# Altium PCB Z80.PcbDoc
Units mm, origin at the board's own origin, x right, y up, seen from the top; angles counter-clockwise.
Board outline 70 x 62.5 mm, 2 copper layers (Top Layer, Bottom Layer); 15 components, 45 nets, 178 pads, 8 vias.
Unrouted connection lines stored in the file: 95.
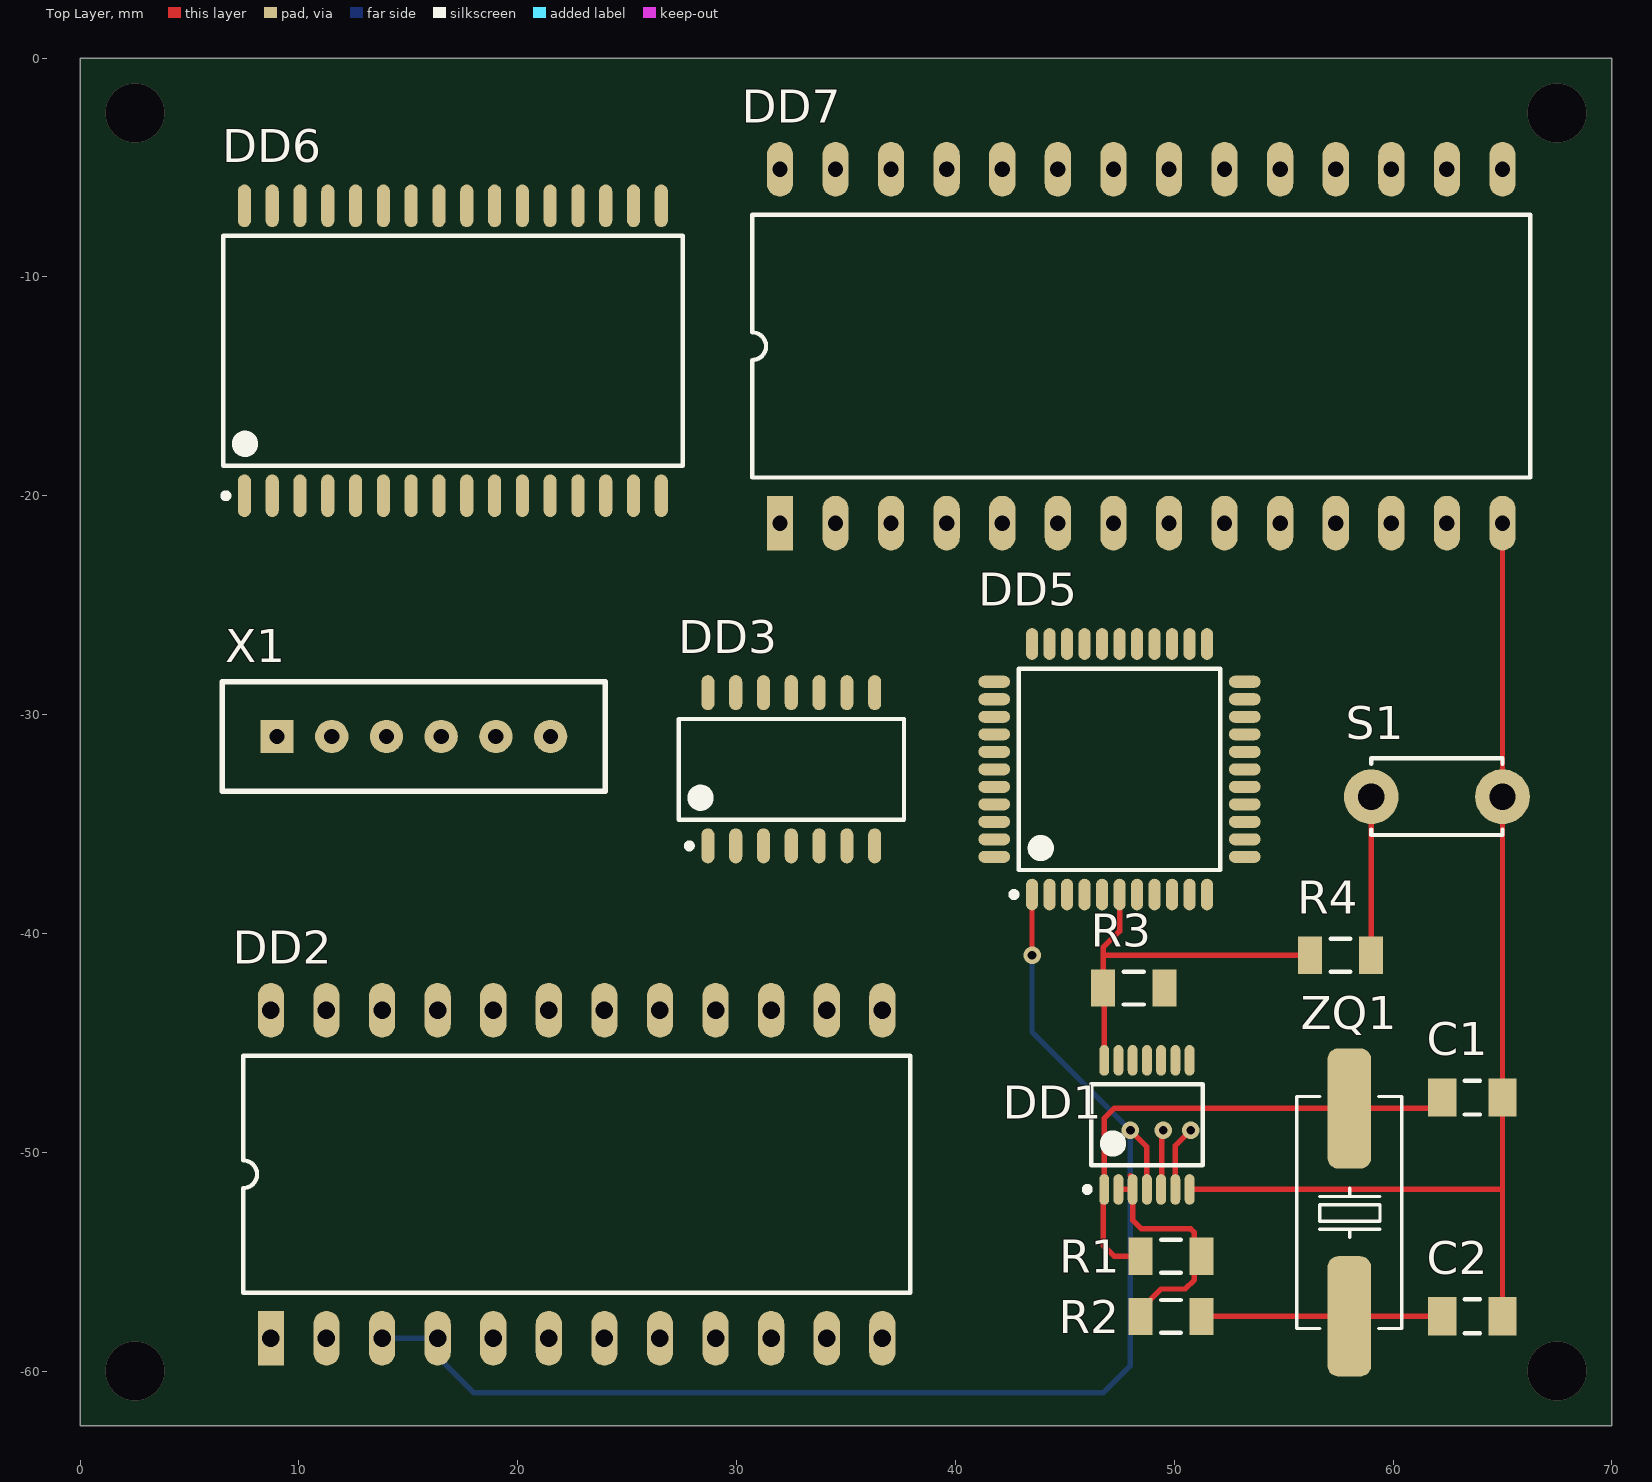
[diagram p0: Top Layer view]
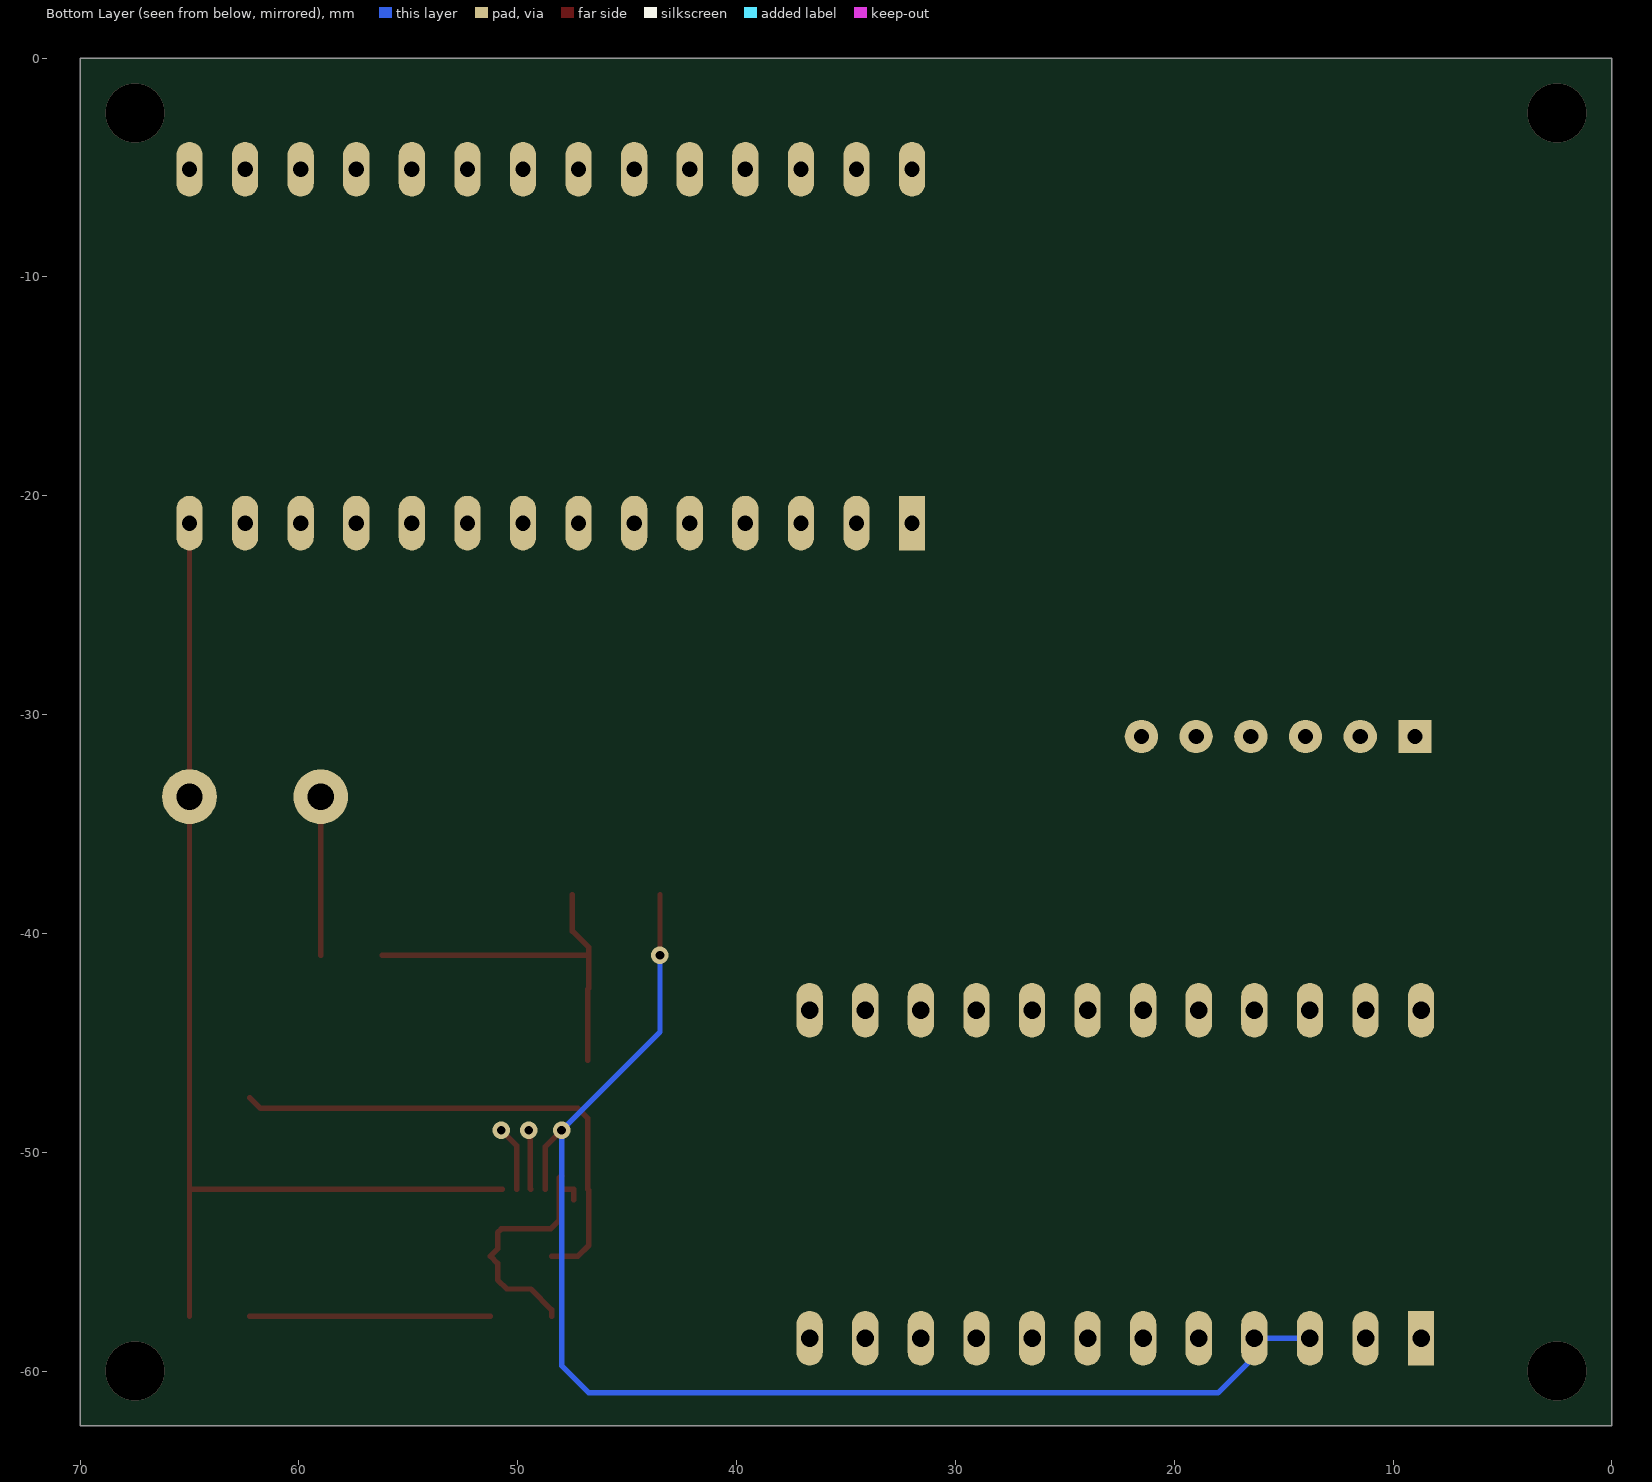
[diagram p1: Bottom Layer view, seen from below]

## Layer stack, top to bottom
Top Solder: solder mask 0.0102, Solder Resist, Dk 3.5
Top Layer: signal copper 0.0356
Dielectric 1: dielectric 0.32, FR-4, Dk 4.8
Bottom Layer: signal copper 0.0356
Bottom Solder: solder mask 0.0102, Solder Resist, Dk 3.5

## Board outline
0,-62.5 0,0 70,0 70,-62.5

## Design rules (kind name [scope] priority, off if disabled: settings)
Clearance Clearance_1 [All] p1: gap=0.254 ignorepadtopadclearanceinfootprint=FALSE except(0: Arc-Hole Track-Hole SMDPad-Hole THPad-Hole Via-Hole Fill-Hole Poly-Hole Region-Hole Text-Hole)
Clearance [All] p2: gap=0.254 ignorepadtopadclearanceinfootprint=FALSE except(0: Arc-Hole Track-Hole SMDPad-Hole THPad-Hole Via-Hole Fill-Hole Poly-Hole Region-Hole Text-Hole)
PolygonConnect [All] p1: connectstyle=Relief reliefconductorwidth=0.254 reliefentries=4 polygonreliefangle="90 Angle" airgapwidth=0.254
RoutingTopology [All] p1: topology=Daisy_Balanced
RoutingVias [All] p1: holewidth=0.711 width=1.27 viastyle="Through Hole" minholewidth=0.711 minwidth=1.27 maxholewidth=0.711 maxwidth=1.27
SolderMaskExpansion [All] p1: expansion=0.102 istentingtop=FALSE
Width [All] p1: maxlimit=0.254 minlimit=0.25 preferedwidth=0.25 minimp=50.000000 maximp=50.000000 favimp=50.000000
29 further rules are at their usual default settings.

## Classes and differential pairs
net class D[0..7]: D0 D1 D2 D3 D4 D5 D6 D7
net class A[0..15]: A0 A1 A2 A3 A4 A5 A6 A7 A8 A9 A10 A11 A12 A13 A14 A15

## Components (designator, comment, footprint, x,y, rotation, side; value= is the part's Value field where it differs from the comment)
C1 "22p" "1206 Capacitor" 63.625,-47.5 r180 top
C2 "22p" "1206 Capacitor" 63.625,-57.5 r180 top
DD1 "74HCT04" TSSOP14 48.75,-48.75 r90 top
DD2 "MC6850S" DIP24 8.72,-58.5 r90 top
DD3 "74LCX32" SOP14 32.5,-32.5 r90 top
DD5 "Z84C0008AEG" LQFP44 47.5,-32.5 r90 top
DD6 "HM628128D" SOP32 17.035,-13.375 r90 top
DD7 "M2764A" DIP28 31.98,-21.25 r90 top
R1 "1M" "1206 Resistor" 49.85,-54.75 r180 top
R2 "1K" "1206 Resistor" 49.85,-57.5 r180 top
R3 "3.3K" "1206 Resistor" 48.15,-42.5 r180 top
R4 "2.2K" "1206 Resistor" 57.6,-41 r180 top
S1 "Tactile button, 6x6mm" "BUT: 6x3.5 TH" 62,-33.75 r180 top
X1 "USB" "USB connector" 6.5,-33.5 r90 top
ZQ1 "7,3728-HC49SM" HC-49S 58,-52.75 r270 top

## Footprints (in the part's own frame and the unit in brackets; to place one, negate y for a bottom-side part, rotate by r counter-clockwise, add the part's x,y. Pads: shape width x height; smd on the part's side, far side on the other; paste and mask are expansions set on the pad)
"1206 Capacitor" [mm] "Chip Capacitor, 2-Leads, Body 3,20x1,60mm, IPC Medium Density"
  rect 1.3x1.75 smd: 1(-1.375,0) 2(1.375,0)
  silkscreen extent -0.35,-0.78 0.35,0.77, body extent -1.6,-0.8 1.6,0.8, height 1.6
"1206 Resistor" [mm] "Chip Resistor, 2-Leads, Body 3,10x1,60mm, IPC Medium Density"
  rect 1.1x1.7 smd: 1(-1.4,0) 2(1.4,0)
  silkscreen extent -0.45,-0.75 0.45,0.75, body extent -1.6,-0.85 1.6,0.85, height 0.65
"BUT: 6x3.5 TH" [mm]
  round 2.5 hole 1.2 mask+0.075: 1(-3,0) 2(3,0)
  silkscreen extent -3,-1.75 3,1.75, body extent -3.88,-1.75 3.88,1.75, height 5.1
DIP24 [mm]
  rect 2.5x1.2 hole 0.8: 1(0,0)
  oval 2.5x1.2 hole 0.8: 2(0,-2.54) 3(0,-5.08) 4(0,-7.62) 5(0,-10.16) 6(0,-12.7) 7(0,-15.24) 8(0,-17.78) 9(0,-20.32) 10(0,-22.86) 11(0,-25.4) 12(0,-27.94) 13(14.99,-27.94) 14(14.99,-25.4) 15(14.99,-22.86) 16(14.99,-20.32) 17(14.99,-17.78) 18(14.99,-15.24) 19(14.99,-12.7) 20(14.99,-10.16) 21(14.99,-7.62) 22(14.99,-5.08) 23(14.99,-2.54) 24(14.99,0)
  silkscreen extent 2.09,-29.21 12.91,1.27, body extent 1,-30 14,2, height 1.55
DIP28 [mm]
  rect 2.5x1.2 hole 0.7: 1(0,0)
  oval 2.5x1.2 hole 0.7: 2(0,-2.54) 3(0,-5.08) 4(0,-7.62) 5(0,-10.16) 6(0,-12.7) 7(0,-15.24) 8(0,-17.78) 9(0,-20.32) 10(0,-22.86) 11(0,-25.4) 12(0,-27.94) 13(0,-30.48) 14(0,-33.02) 15(16.17,-33.02) 16(16.17,-30.48) 17(16.17,-27.94) 18(16.17,-25.4) 19(16.17,-22.86) 20(16.17,-20.32) 21(16.17,-17.78) 22(16.17,-15.24) 23(16.17,-12.7) 24(16.17,-10.16) 25(16.17,-7.62) 26(16.17,-5.08) 27(16.17,-2.54) 28(16.17,0)
  silkscreen extent 2.08,-34.29 14.09,1.27, body extent 1,-35 15,2, height 5.8
HC-49S [mm]
  rrect50% 5.5x2 smd: 1(-4.75,0) 2(4.75,0)
  silkscreen extent -5.3,-2.4 5.3,2.4, body extent -6.17,-2.35 6.13,2.35, height 4.35
LQFP44 [mm] "LQFP, 44-Leads, Body 10,00x10,00mm, Pitch 0,80mm, IPC Medium Densit"
  oval 1.45x0.55 smd: 1(-5.725,4) 2(-5.725,3.2) 3(-5.725,2.4) 4(-5.725,1.6) 5(-5.725,0.8) 6(-5.725,0) 7(-5.725,-0.8) 8(-5.725,-1.6) 9(-5.725,-2.4) 10(-5.725,-3.2) 11(-5.725,-4) 23(5.725,-4) 24(5.725,-3.2) 25(5.725,-2.4) 26(5.725,-1.6) 27(5.725,-0.8) 28(5.725,0) 29(5.725,0.8) 30(5.725,1.6) 31(5.725,2.4) 32(5.725,3.2) 33(5.725,4)
  oval 0.55x1.45 smd: 12(-4,-5.725) 13(-3.2,-5.725) 14(-2.4,-5.725) 15(-1.6,-5.725) 16(-0.8,-5.725) 17(0,-5.725) 18(0.8,-5.725) 19(1.6,-5.725) 20(2.4,-5.725) 21(3.2,-5.725) 22(4,-5.725) 34(4,5.725) 35(3.2,5.725) 36(2.4,5.725) 37(1.6,5.725) 38(0.8,5.725) 39(0,5.725) 40(-0.8,5.725) 41(-1.6,5.725) 42(-2.4,5.725) 43(-3.2,5.725) 44(-4,5.725)
  silkscreen extent -5.85,-4.6 4.6,4.95, body extent -6,-6 6,6, height 1.6
SOP14 [mm] "SOP, 14-Leads, Body 10,20x5,30mm, Pitch 1,27mm, IPC Medium Density"
  oval 1.6x0.6 smd: 1(-3.5,3.81) 2(-3.5,2.54) 3(-3.5,1.27) 4(-3.5,0) 5(-3.5,-1.27) 6(-3.5,-2.54) 7(-3.5,-3.81) 8(3.5,-3.81) 9(3.5,-2.54) 10(3.5,-1.27) 11(3.5,0) 12(3.5,1.27) 13(3.5,2.54) 14(3.5,3.81)
  silkscreen extent -3.62,-5.15 2.3,5.15, body extent -3.85,-5.15 3.85,5.15, height 2.1
SOP32 [mm] "SOP, 32-Leads, Body 20,70x11,30mm, Pitch 1,27mm, IPC Medium Density"
  oval 1.95x0.6 smd: 1(-6.625,9.525) 2(-6.625,8.255) 3(-6.625,6.985) 4(-6.625,5.715) 5(-6.625,4.445) 6(-6.625,3.175) 7(-6.625,1.905) 8(-6.625,0.635) 9(-6.625,-0.635) 10(-6.625,-1.905) 11(-6.625,-3.175) 12(-6.625,-4.445) 13(-6.625,-5.715) 14(-6.625,-6.985) 15(-6.625,-8.255) 16(-6.625,-9.525) 17(6.625,-9.525) 18(6.625,-8.255) 19(6.625,-6.985) 20(6.625,-5.715) 21(6.625,-4.445) 22(6.625,-3.175) 23(6.625,-1.905) 24(6.625,-0.635) 25(6.625,0.635) 26(6.625,1.905) 27(6.625,3.175) 28(6.625,4.445) 29(6.625,5.715) 30(6.625,6.985) 31(6.625,8.255) 32(6.625,9.525)
  silkscreen extent -6.75,-10.5 5.25,10.5, body extent -7.07,-10.5 7.07,10.5, height 3
TSSOP14 [mm] "TSSOP, 14-Leads, Body 5,00x4,40mm, Pitch 0,65mm, IPC Medium Density"
  oval 1.4x0.45 smd: 1(-2.95,1.95) 2(-2.95,1.3) 3(-2.95,0.65) 4(-2.95,0) 5(-2.95,-0.65) 6(-2.95,-1.3) 7(-2.95,-1.95) 8(2.95,-1.95) 9(2.95,-1.3) 10(2.95,-0.65) 11(2.95,0) 12(2.95,0.65) 13(2.95,1.3) 14(2.95,1.95)
  silkscreen extent -3.07,-2.55 1.85,2.85, body extent -3.2,-2.55 3.2,2.55, height 1.2
"USB connector" [mm]
  rect 1.524x1.524 hole 0.7: 1(2.5,-2.5)
  round 1.524 hole 0.7: 2(2.5,-5) 3(2.5,-7.5) 4(2.5,-10) 5(2.5,-12.5) 6(2.5,-15)
  silkscreen extent 0,-17.5 5,0

## Part data
C1 C2: library part Capacitor
DD1: "6x not gate"
DD2: "ACIA"
DD3: "4x 2-or gates"
DD5: "Z80 CPU, 8Mhz"
DD6: "RAM"
DD7: "eprom"
R1 R2 R3 R4: library part Resistor, "5%, 0.5W"
S1: library part Button_tactile, Manufacturer="TE Connectivity", Package=6x6mm, PartNumber=FSM2JSMAATR, CommentText=Reset, HelpURL=https://www.digikey.com/product-detail/en/te-connectivity-alcoswitch-switches/FSM2JSMAATR/450-1792-1-ND/3503931, TypeButton="Tactile button", ValueManufacturerPartNumber="Tactile button, 6x6mm"
ZQ1: "Резонатор"

## Via types
v1: diameter 0.8, hole 0.4, Top Layer to Bottom Layer, 4 vias
v2: diameter 2.7, hole 2.7, Top Layer to Bottom Layer, 4 vias

## Nets (pads, with @x,y where several pads share a name; then routed paths per layer and width w, separated by ;. In a path a pad name is that pad's centre, name@x,y a point inside that pad or via, vN(x,y) a via of type N, cw(c..) or ccw(c..) an arc to the next point about the centre after c; other vN are vias at no path point)
+5: DD1.14 DD2.12 DD3.14 DD5.6 DD5.13 DD5.21 DD5.22 DD6.32 DD7.28 R3.2 R4.2 X1.4 | length 17.4
  Top Layer w0.25: DD1.14 46.8,-42.55 R3.2 46.75,-41 ; DD5.6 47.5,-39.891 46.75,-40.641 46.75,-41 ; R4.2 46.75,-41
A0: DD2.11 DD5.27 DD6.12 DD7.10
A1: DD5.28 DD6.11 DD7.9
A2: DD5.29 DD6.10 DD7.8
A3: DD5.30 DD6.9 DD7.7
A4: DD5.31 DD6.8 DD7.6
A5: DD5.32 DD6.7 DD7.5
A6: DD2.10 DD5.34 DD6.6 DD7.4
A7: DD2.9 DD5.35 DD6.5 DD7.3
A8: DD5.36 DD6.27 DD7.25
A9: DD5.37 DD6.26 DD7.24
A10: DD5.38 DD6.23 DD7.21
A11: DD5.40 DD6.25 DD7.23
A12: DD5.41 DD6.4 DD7.2
A13: DD3.10 DD5.42 DD6.28
A14: DD3.9 DD5.43 DD6.3
A15: DD3.13 DD5.44 DD6.31
D0: DD2.22 DD5.9 DD6.13 DD7.11
D1: DD2.21 DD5.10 DD6.14 DD7.12
D2: DD2.20 DD5.7 DD6.15 DD7.13
D3: DD2.19 DD5.3 DD6.17 DD7.15
D4: DD2.18 DD5.2 DD6.18 DD7.16
D5: DD2.17 DD5.4 DD6.19 DD7.17
D6: DD2.16 DD5.5 DD6.20 DD7.18
D7: DD2.15 DD5.8 DD6.21 DD7.19
GND: C1.1 C2.1 DD1.7 DD2.1 DD3.7 DD5.26 DD6.2 DD6.16 DD6.22 DD7.1 DD7.14 S1.1 X1.6 | length 50.6
  Top Layer w0.25: DD1.7 64.95,-51.7 65,-51.75 ; C2.1 65,-51.75 ; DD7.14 S1.1 C1.1 65,-51.75
NetC1_2: C1.2 DD1.1 R1.2 ZQ1.1 | length 23.6
  Top Layer w0.25: R1.2 47.25,-54.75 46.75,-54.25 46.75,-52.366 46.762,-52.355 46.762,-51.738 DD1.1 46.8,-48.45 47.25,-48 ZQ1.1 61.75,-48 C1.2
NetC2_2: C2.2 R2.1 ZQ1.2 | length 11
  Top Layer w0.25: R2.1 ZQ1.2 C2.2
NetDD1_2: DD1.2 DD1.3 R1.1 R2.2 | length 12
  Top Layer w0.25: DD1.2@47.45,-52.175 DD1.2 DD1.3 ; DD1.3@48,-51.071 48.1,-51.171 DD1.3 ; R2.2 48.45,-57.2 49.4,-56.25 50.5,-56.25 50.921,-55.829 50.921,-55.079 R1.1 50.921,-54.421 50.921,-53.671 50.75,-53.5 48.5,-53.5 48.1,-53.1 DD1.3
NetDD1_4: DD1.4 DD2.3 DD2.4 DD5.1 | length 62.6
  Top Layer w0.25: v1(43.5,-41) DD5.1 ; v1(48,-49) 48.75,-49.75 DD1.4
  Bottom Layer w0.25: DD2.3 DD2.4 16.34,-59.34 18,-61 46.75,-61 48,-59.75 v1(48,-49) 43.5,-44.5 v1(43.5,-41)
NetDD1_5: DD1.5 DD5.16 | length 2.7
  Top Layer w0.25: DD1.5 49.438,-51.662 49.438,-49.062 v1(49.5,-49)
NetDD1_6: DD1.6 DD2.14 | length 3
  Top Layer w0.25: DD1.6 50.05,-49.7 v1(50.75,-49)
NetDD2_2: DD2.2 X1.2
NetDD2_5: DD2.5 X1.5
NetDD2_6: DD2.6 X1.3
NetDD2_7: DD2.7 DD5.12 R3.1
NetDD2_8: DD2.8 DD5.24
NetDD2_13: DD2.13 DD3.4 DD5.19
NetDD3_1: DD3.1 DD3.5 DD5.15
NetDD3_2: DD3.2 DD5.18
NetDD3_3: DD3.3 DD6.24 DD7.22
NetDD3_6: DD3.6 DD6.29
NetDD3_8: DD3.8 DD3.12
NetDD3_11: DD3.11 DD6.30 DD7.20
NetDD5_23: DD5.23 R4.1 S1.2 | length 7.2
  Top Layer w0.25: R4.1 S1.2
pads on no net: DD1.8 DD1.9 DD1.10 DD1.11 DD1.12 DD1.13 DD2.23 DD2.24 DD5.11 DD5.14 DD5.17 DD5.20 DD5.25 DD5.33 DD5.39 DD6.1 DD7.26 DD7.27 X1.1
copper on no net:
  other v2: 2.5,-60 67.5,-60 2.5,-2.5 67.5,-2.5

## Silkscreen, mask and mechanical layers (free items; w line width, h text height)
Mechanical 1:
  the board outline again, w0.254